# Altium PCB pcie2displayport.PcbDoc
Units mil, origin at the board's own origin, x right, y up, seen from the top; angles counter-clockwise.
Board outline 2602.36 x 1015.75 mil, 2 copper layers (Top Layer, Bottom Layer); 19 components, 15 nets, 160 pads, 80 vias.
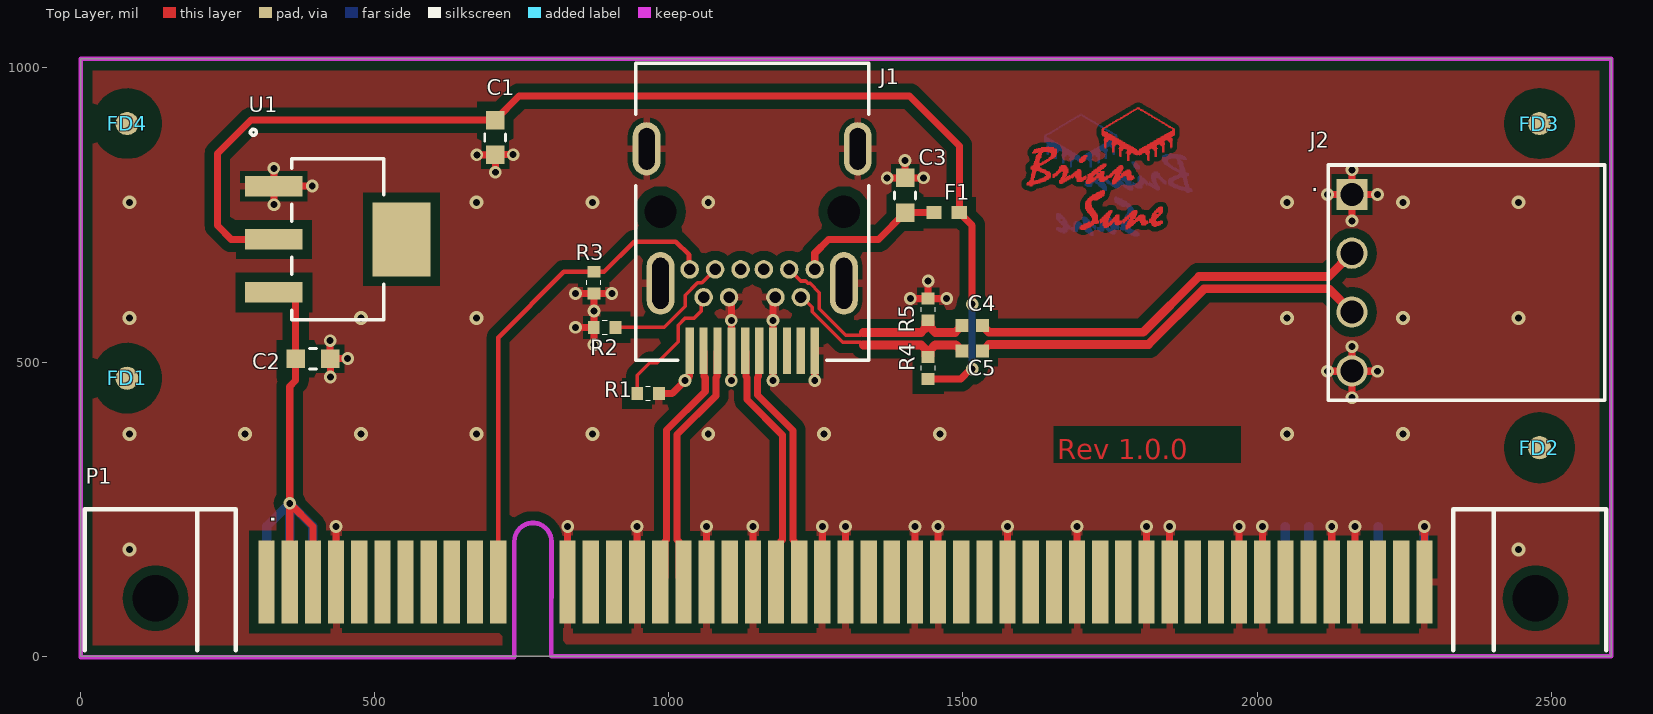
[diagram p0: Top Layer view]
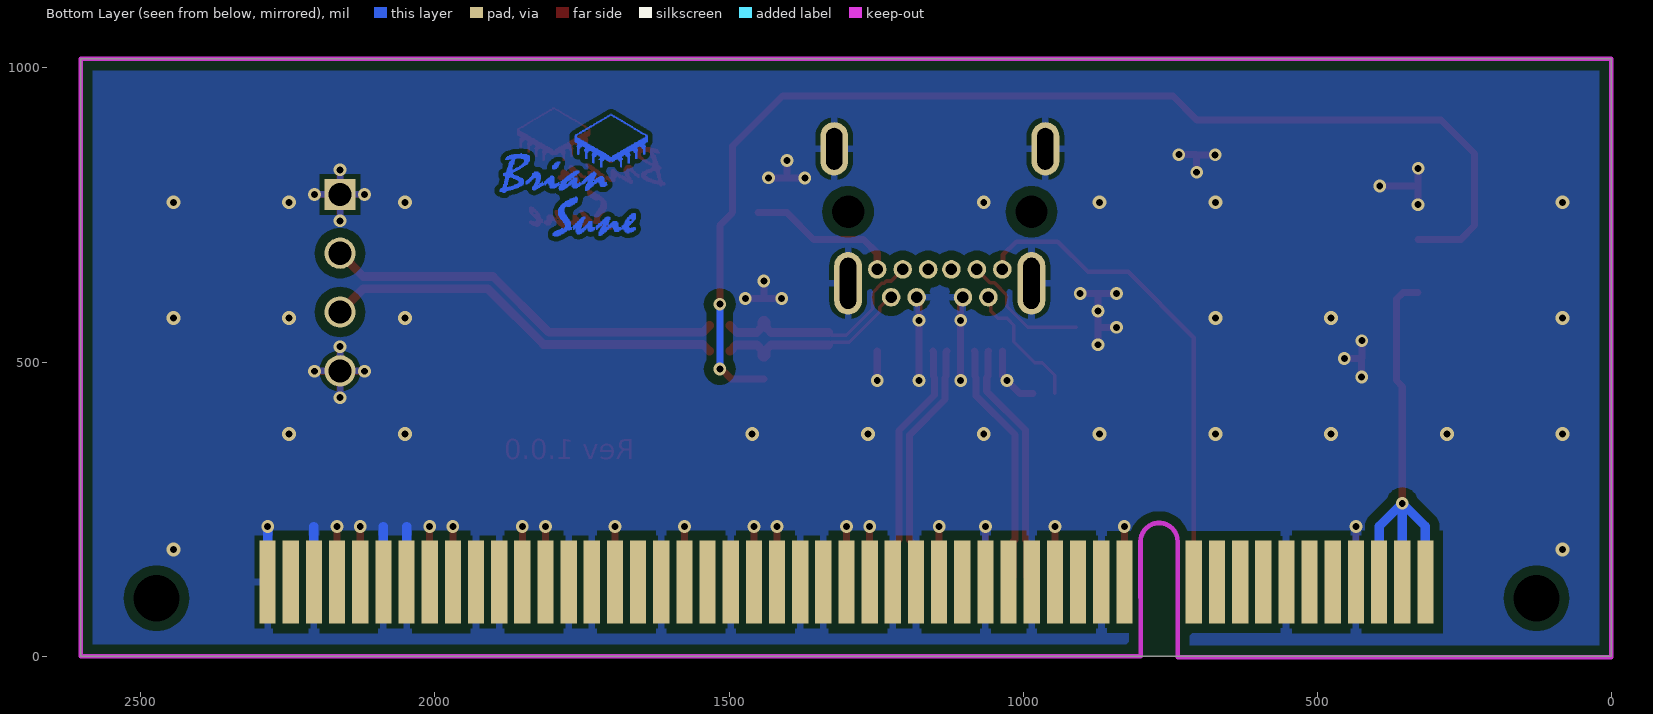
[diagram p1: Bottom Layer view, seen from below]
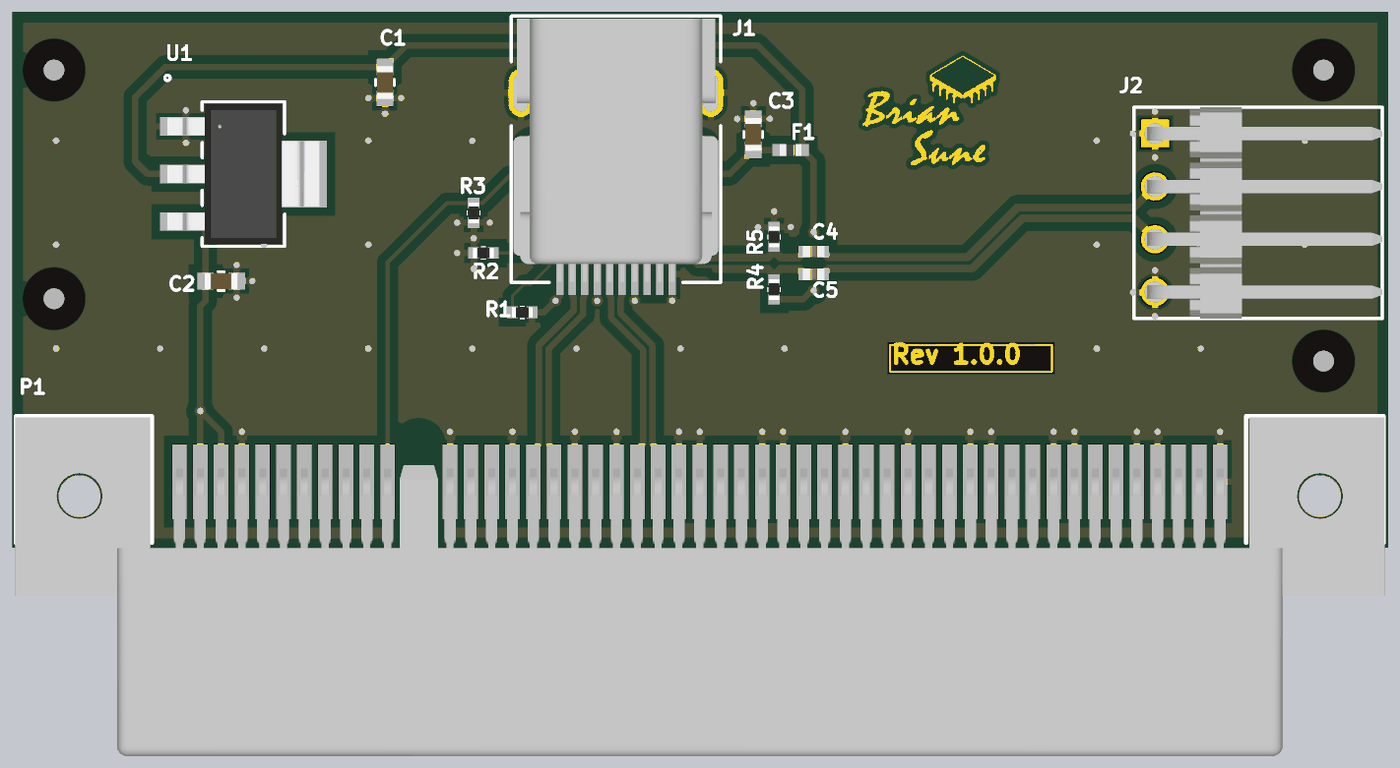
[diagram p2: 3D render of the assembled board from above, using the file's embedded part models]

## Layer stack, top to bottom
Top Solder: solder mask 0.4, Solder Resist, Dk 3.5
Top Layer: signal copper 1.4
Dielectric 1: dielectric 12.6, FR-4, Dk 4.8
Bottom Layer: signal copper 1.4
Bottom Solder: solder mask 0.4, Solder Resist, Dk 3.5

## Board outline
0,0 2602.36,0 2602.36,1015.75 0,1015.75

## Design rules (kind name [scope] priority, off if disabled: settings)
Clearance [All] p1: gap=6 ignorepadtopadclearanceinfootprint=FALSE except(0: Arc-Hole Track-Hole SMDPad-Hole THPad-Hole Via-Hole Fill-Hole Poly-Hole Region-Hole Text-Hole; 8: SMDPad-Region THPad-Region Poly-Region; 16: Arc-Poly Track-Poly SMDPad-Poly THPad-Poly Via-Poly Fill-Poly Poly-Poly)
DiffPairsRouting [All] p1: maxlimit=10 minlimit=6 mostfreqgap=8 toplayer_minwidth=6 toplayer_maxwidth=15 toplayer_prefwidth=8 bottomlayer_minwidth=6 bottomlayer_maxwidth=15 bottomlayer_prefwidth=8 maxuncoupledlength=500
Height [All] p1: minheight=0 maxheight=1574.8 prefheight=500
HoleSize [All] p1: absolutevalues=TRUE maxlimit=236.22 minlimit=1 maxpercent=80.000 minpercent=20.000
HoleToHoleClearance [All] p1: gap=3 allowstackedmicrovias=TRUE
MinimumSolderMaskSliver [All] p1: minsoldermaskwidth=1
PolygonConnect [All] p1: thpad.connectstyle=Relief thpad.reliefconductorwidth=12 thpad.reliefentries=4 thpad.polygonreliefangle="90 Angle" thpad.airgapwidth=8 smdpad.connectstyle=Relief smdpad.reliefconductorwidth=12 smdpad.reliefentries=4 smdpad.polygonreliefangle="90 Angle" smdpad.airgapwidth=8 via.connectstyle=Direct via.reliefconductorwidth=12 via.reliefentries=4 via.polygonreliefangle="45 Angle" via.airgapwidth=8
RoutingVias [All] p1: holewidth=15.75 width=23.62 viastyle="Through Hole" minholewidth=11.81 minwidth=19.68 maxholewidth=110.24 maxwidth=118.11
SilkToSilkClearance [All] p1: silktosilkclearance=3
SilkToSolderMaskClearance [IsPad] p1: minsilkscreentomaskgap=1 clearancetoexposedcopper=TRUE
SolderMaskExpansion [All] p1: expansion=1
Width [All] p1: maxlimit=40 minlimit=6 preferedwidth=10
23 further rules are at their usual default settings.

## Classes and differential pairs
differential pair class DP_DIFF_F: DP_AUX
differential pair class DP_DIFF: DP_TX_AUX DP_TX_LANE0 DP_TX_LANE1
differential pair DP_TX_AUX: +DP_TX_AUX_P -DP_TX_AUX_N
differential pair DP_AUX: +DP_AUX_P -DP_AUX_N
differential pair DP_TX_LANE1: +DP_TX_LANE1_P -DP_TX_LANE1_N
differential pair DP_TX_LANE0: +DP_TX_LANE0_P -DP_TX_LANE0_N

## Components (designator, comment, footprint, x,y, rotation, side; value= is the part's Value field where it differs from the comment)
C1 "1uF" *CAPC1608X90 704.72,881.89 r270 top
C2 "1uF" *CAPC1608X90 394.8,505.7 r0 top
C3 "1uF" *CAPC1608X90 1401.57,783.46 r90 top
C4 "0.1uF" CAP_CC0402_YAG 1515.75,561.96 r0 top
C5 "0.1uF" CAP_CC0402_YAG 1515.75,518.65 r0 top
F1 "" 0435Series_LTF 1472.44,753.94 r180 top
FD1 "fiducial" FD12D 78.74,472.44 r0 top
FD2 "fiducial" FD12D 2480.32,354.33 r0 top
FD3 "fiducial" FD12D 2480.32,905.51 r0 top
FD4 "fiducial" FD12D 78.74,905.51 r0 top
J1 "E9320-001-01" CONN_E9320-001-01_PUL 1141.73,633.86 r180 top
J2 "901210124" CON_901210124 2161.42,785.04 r90 top
P1 "2387405-3" PCIEG4,SMT,STRADDLE,98POS,G/F,O/E 768.82,0 r0 top
R1 "1M" 0402_PAN 964.57,446.63 r180 top
R2 "1M" 0402_PAN 890.95,559 r0 top
R3 "100k" 0402_PAN 872.45,634.98 r90 top
R4 "100k" 0402_PAN 1440.94,489.91 r270 top
R5 "100k" 0402_PAN 1440.94,589.52 r270 top
U1 "AMS1117-3.3" SOT_AMS_ADS 437.01,708.66 r270 top

## Footprints (in the part's own frame and the unit in brackets; to place one, negate y for a bottom-side part, rotate by r counter-clockwise, add the part's x,y. Pads: shape width x height; smd on the part's side, far side on the other; paste and mask are expansions set on the pad)
0402_PAN [mil]
  rect 20x22 smd paste+0 mask+0: 1(-18.5,0) 2(18.5,0)
  silkscreen extent -4,-12 4,12, body extent -20,-10 20,10, height 14
0435Series_LTF [mil]
  rect 26x22 smd paste+0 mask+0: 1(-21.5,0) 2(21.5,0)
  body extent -21,-11 21,11, height 16
*CAPC1608X90 [mm]
  rect 0.8x0.8 smd: 1(-0.75,0) 2(0.75,0)
  silkscreen extent -0.15,-0.45 0.15,0.45, body extent -0.8,-0.4 0.8,0.4, height 0.6
CAP_CC0402_YAG [mil]
  rect 22x22 smd: 1(-17.5,0) 2(17.5,0)
  body extent -21,-11 21,11, height 22
CON_901210124 [mm]
  rect 1.35x1.35 hole 1 mask+0.076: 1(0,0)
  round 1.35 hole 1 mask+0.076: 2(-2.54,0) 3(-5.08,0) 4(-7.62,0)
  silkscreen extent -8.89,-10.92 1.27,1.02, body extent -8.89,-10.92 1.27,0.39, height 3.8
CONN_E9320-001-01_PUL [mm]
  rect 0.356x2.007 smd paste+0 mask+0: 1(2.7,2.915) 3(2.1,2.915) 5(1.5,2.915) 7(0.9,2.915) 9(0.3,2.915) 11(-0.3,2.915) 13(-0.9,2.915) 15(-1.5,2.915) 17(-2.1,2.915) 19(-2.7,2.915)
  round 0.8 hole 0.5: 2(2.7,-0.6) 4(2.1,0.6) 6(1.6,-0.6) 8(1,0.6) 10(0.5,-0.6) 12(-0.5,-0.6) 14(-1,0.6) 16(-1.6,-0.6) 18(-2.1,0.6) 20(-2.7,-0.6)
  round 0.025 hole 1.4 unplated: F(-3.96,-3.09) F(3.96,-3.09)
  oval 1.2x2.3 hole 0.7 slot 1.8 at 90 deg: M(-4.56,-5.81) M(4.56,-5.81)
  oval 1.2x2.7 hole 0.7 slot 2.2 at 90 deg: M(-3.96,0) M(3.96,0)
  Multi-Layer lines w0.711: 3.96,0.648 3.96,0 3.96,-0.648 ; -3.96,0.648 -3.96,0 -3.96,-0.648
  silkscreen extent -5.03,-9.5 5.03,3.32, body extent -4.92,-9.37 4.93,3.29, height 6.16
FD12D [mm]
  round 1 smd mask+1: FD(0,0)
  Top Layer pour cut-out: 0,1.524 -0.661,1.373 -1.192,0.95 -1.486,0.339 -1.486,-0.339 -1.192,-0.95 -0.661,-1.373 0,-1.524 0,-1.524
  Top Layer pour cut-out: 0,-1.524 0.661,-1.373 1.192,-0.95 1.486,-0.339 1.486,0.339 1.192,0.95 0.661,1.373 0,1.524 0,1.524
  Top Layer pour cut-out: 0,0
PCIEG4,SMT,STRADDLE,98POS,G/F,O/E [mm]
  rect 0.7x3.6 smd: A01(-11.5,3.2) A02(-10.5,3.2) A03(-9.5,3.2) A04(-8.5,3.2) A05(-7.5,3.2) A06(-6.5,3.2) A07(-5.5,3.2) A08(-4.5,3.2) A09(-3.5,3.2) A10(-2.5,3.2) A11(-1.5,3.2) A12(1.5,3.2) A13(2.5,3.2) A14(3.5,3.2) A15(4.5,3.2) A16(5.5,3.2) A17(6.5,3.2) A18(7.5,3.2) A19(8.5,3.2) A20(9.5,3.2) A21(10.5,3.2) A22(11.5,3.2) A23(12.5,3.2) A24(13.5,3.2) A25(14.5,3.2) A26(15.5,3.2) A27(16.5,3.2) A28(17.5,3.2) A29(18.5,3.2) A30(19.5,3.2) A31(20.5,3.2) A32(21.5,3.2) A33(22.5,3.2) A34(23.5,3.2) A35(24.5,3.2) A36(25.5,3.2) A37(26.5,3.2) A38(27.5,3.2) A39(28.5,3.2) A40(29.5,3.2) A41(30.5,3.2) A42(31.5,3.2) A43(32.5,3.2) A44(33.5,3.2) A45(34.5,3.2) A46(35.5,3.2) A47(36.5,3.2) A48(37.5,3.2) A49(38.5,3.2)
  rect 0.7x3.6 smd far side: B01(-11.5,3.2) B02(-10.5,3.2) B03(-9.5,3.2) B04(-8.5,3.2) B05(-7.5,3.2) B06(-6.5,3.2) B07(-5.5,3.2) B08(-4.5,3.2) B09(-3.5,3.2) B10(-2.5,3.2) B11(-1.5,3.2) B12(1.5,3.2) B13(2.5,3.2) B14(3.5,3.2) B15(4.5,3.2) B16(5.5,3.2) B17(6.5,3.2) B18(7.5,3.2) B19(8.5,3.2) B20(9.5,3.2) B21(10.5,3.2) B22(11.5,3.2) B23(12.5,3.2) B24(13.5,3.2) B25(14.5,3.2) B26(15.5,3.2) B27(16.5,3.2) B28(17.5,3.2) B29(18.5,3.2) B30(19.5,3.2) B31(20.5,3.2) B32(21.5,3.2) B33(22.5,3.2) B34(23.5,3.2) B35(24.5,3.2) B36(25.5,3.2) B37(26.5,3.2) B38(27.5,3.2) B39(28.5,3.2) B40(29.5,3.2) B41(30.5,3.2) B42(31.5,3.2) B43(32.5,3.2) B44(33.5,3.2) B45(34.5,3.2) B46(35.5,3.2) B47(36.5,3.2) B48(37.5,3.2) B49(38.5,3.2)
  round 0 hole 2: M(-16.3,2.5) M(43.3,2.5)
  Keep-Out Layer lines w0.203: -0.809,-0.047 -0.8,4.953 cw(c0,4.953) 0.8,4.953 ; 0.791,0 0.8,4.952
  silkscreen extent -19.35,0.25 46.35,6.35, body extent -19.4,-10 46.4,6.3, height 3.7
SOT_AMS_ADS [mil]
  rect 35x98 smd paste+0 mask+0: 1(-90.16,-108.5) 2(0,-108.5) 3(90.16,-108.5)
  rect 126x98 smd paste+0 mask+0: 4(0,108.5)
  silkscreen extent -187,-148 137,78, body extent -132,-143 132,144, height 71

## Part data
C1 C2 C3: library part 0603F105M500NT, "1uF(105) ±20% 50V X7R 0603F105M500NT", Package="0603 Kemet", ComponentLink1Description=Taobao, ComponentLink1URL=https://item.taobao.com/item.htm?spm=a1z09.2.0.0.1e6b2e8dpr7A02&id=560896377413&_u=o10quk0k0a55, MF=KEMET, MP=C0603C104Z3VACTU, Price=None
C4 C5: library part CC0402MRX5R6BB106, "No Description Available", Mfr_Name=Yageo, Copyright="Copyright (C) 2022 Ultra Librarian. All rights reserved.", Manufacturer_Part_Number=CC0402MRX5R6BB106, RefDes=RefDes, Type=DEV
F1: library part 0402L100SLKR, "No Description Available", Mfr_Name="Littelfuse Inc", Copyright="Copyright (C) 2021 Ultra Librarian. All rights reserved.", Manufacturer_Part_Number=0402L100SLKR, RefDes=RefDes, Type=DEV
J1: "No Description Available", Mfr_Name="Pulse Electronics Corporation", Copyright="Copyright (C) 2022 Ultra Librarian. All rights reserved.", Manufacturer_Part_Number=E9320-001-01, RefDes=RefDes, Type=DEV
J2: "No Description Available", Mfr_Name="Molex Connector Corporation", Copyright="Copyright (C) 2021 Ultra Librarian. All rights reserved.", Manufacturer_Part_Number=901210124, RefDes=RefDes, Type=DEV
P1: library part PCIE-098-02-X-D-EMS2-BG, "PCIEG4,SMT,STRADDLE,98POS,G/F,O/E", Package=None, Availability=Unavailable, MF="Samtec Inc.", MP=PCIE-098-02-X-D-EMS2-BG, Price=None
R1 R2 R3 R4 R5: library part ERJ2RHD2400X, "0402 1% Resistor", Built_By=EMA_UL_Team, Copyright="Copyright (C) 2018 Accelerated Designs. All rights reserved", Manufacturer_Part_Number=ERJ2RHD2400X, RefDes=RefDes, SourceLibrary=Panasonic_2016-11-1, Type=DEV, Vendor=Panasonic
U1: "No Description Available", Built_By=EMA_Matt, Copyright="Copyright (C) 2018 Accelerated Designs. All rights reserved", Manufacturer_Part_Number=AMS1117-3.3, RefDes=RefDes, SourceLibrary=Advanced_Monolithic_Systems_10-16-2019, Type=DEV, Vendor="Advanced Monolithic Systems"

## Via types
v1: diameter 21.65, hole 11.81, Top Layer to Bottom Layer, tented both sides, 55 vias
v2: diameter 23.62, hole 11.81, Top Layer to Bottom Layer, tented both sides, 25 vias

## Nets (pads, with @x,y where several pads share a name; then routed paths per layer and width w, separated by ;. In a path a pad name is that pad's centre, name@x,y a point inside that pad or via, vN(x,y) a via of type N, cw(c..) or ccw(c..) an arc to the next point about the centre after c; other vN are vias at no path point)
+3V3: C1.1 F1.1 R4.2 U1.2 | length 2035.5
  Top Layer w12: U1.2 255.91,708.66 232.28,732.28 232.28,854.33 289.37,911.42 C1.1 745.44,952.13 1409.45,952.13 1493.94,867.64 F1.1 1515.74,732.13 v1(1515.74,598.42) ; R4.2 1496.35,471.41 1513.13,488.19 v1(1515.74,488.19)
  Bottom Layer w12: v1(1515.74,488.19) v1(1515.74,598.42)
+12: C2.1 P1.A02 P1.A03 P1.B01 P1.B02 P1.B03 U1.3 | length 1111
  Top Layer w12: U1.3 353.78,618.5 365.28,607 C2.1 365.28,468.5 355.43,458.66 v1(355.43,259.84) ; P1.A02 v1(355.43,259.84) ; P1.A03 394.8,220.47 v1(355.43,259.84)
  Bottom Layer w16: P1.B01 316.44,126.36 316.44,220.85 v1(355.43,259.84) ; P1.B02 v1(355.43,259.84) ; P1.B03 394.43,126.36 394.43,220.85 v1(355.43,259.84)
DP_AUX_N: C5.2 J2.3 | length 688.4
  Top Layer w15: C5.2 1544.4,529.81 1815.41,529.81 1910.14,624.54 2121.92,624.54 J2.3
DP_AUX_P: C4.2 J2.2 | length 688.4
  Top Layer w15: C4.2 1544.4,550.81 1806.71,550.81 1901.44,645.54 2121.92,645.54 J2.2
DP_TX_AUX_N: C5.1 J1.18 R4.1 | length 344.8
  Top Layer w6: J1.18 1227.12,610.24 1243.91,593.45 1243.91,585.58 1295.77,533.71 1326.21,533.71 1330.71,529.21
  Top Layer w15: 1330.71,529.21 1428.66,529.21 1437.44,520.43 1437.44,510.91 1439.94,508.41 R4.1 1441.94,508.41 1444.44,510.91 1444.44,520.43 1453.23,529.21 1487.69,529.21 C5.1
DP_TX_AUX_P: C4.1 J1.16 R5.2 | length 391.1
  Top Layer w6: J1.16 1224.41,637.8 1232.28,637.8 1236.22,633.86 1240.16,633.86 1255.91,618.11 1255.91,590.55 1300.74,545.71 1326.21,545.71 1330.71,550.21
  Top Layer w15: 1330.71,550.21 1428.66,550.21 1437.44,559 1437.44,568.52 1439.94,571.02 R5.2 1441.94,571.02 1444.44,568.52 1444.44,559 1453.23,550.21 1486.5,550.21 C4.1
DP_TX_HPD: J1.2 P1.A11 R3.2 | length 842.3
  Top Layer w8: P1.A11 709.76,541.6 821.65,653.48 R3.2 889.7,653.48 940.94,704.72 1011.81,704.72 1034.31,682.23 1034.31,658.6 J1.2
DP_TX_LANE0_N: J1.5 P1.A17 | length 426
  Top Layer w12: P1.A17 1016.94,133.76 1016.94,194.97 1014.04,197.88 1014.04,376.84 1079.87,442.66 1079.87,473.61 1081.68,475.42 1081.68,518.09 J1.5
DP_TX_LANE0_P: J1.3 P1.A16 | length 426
  Top Layer w12: P1.A16 993.13,133.76 993.13,194.97 996.04,197.88 996.04,384.29 1061.87,450.12 1061.87,473.61 1060.06,475.42 1060.06,518.09 J1.3
DP_TX_LANE1_N: J1.11 P1.A22 | length 423.6
  Top Layer w12: J1.11 1152.54,518.09 1152.54,475.42 1150.73,473.61 1150.73,443.76 1210.89,383.6 1210.89,197.88 1213.8,194.97 1213.8,133.76 P1.A22
DP_TX_LANE1_P: J1.9 P1.A21 | length 423.6
  Top Layer w12: J1.9 1130.92,518.09 1130.92,475.42 1132.73,473.61 1132.73,436.3 1192.89,376.14 1192.89,197.88 1189.98,194.97 1189.98,133.76 P1.A21
GND: C1.2 C2.2 C3.2 J1.1 J1.7 J1.8 J1.13 J1.14 J1.19 J1.M J2.1 J2.4 P1.A04 P1.A12 P1.A15 P1.A18 P1.A20 P1.A23 P1.A24 P1.A27 P1.A28 P1.A31 P1.A34 P1.A37 P1.A38 P1.A41 P1.A42 P1.A45 P1.A46 P1.A49 P1.B04 P1.B07 P1.B13 P1.B16 P1.B18 P1.B21 P1.B22 P1.B25 P1.B26 P1.B29 P1.B32 P1.B35 P1.B36 P1.B39 P1.B40 P1.B43 P1.B44 P1.B47 P1.B49 R1.1 R2.1 R3.1 R5.1 U1.1 | length 3541.7
  Top Layer w12: v1(328.34,829.46) U1.1@328.34,798.99 ; v1(328.51,767.66) U1.1 U1.1@328.34,798.99 ; v1(393.7,799.21) 328.56,799.21 U1.1@328.34,798.99 ; v1(424.16,536.34) C2.2@424.16,505.87 ; v1(424.33,474.55) C2.2 C2.2@424.16,505.87 ; P1.A04 v1(434.17,220.47) ; v1(453.94,505.87) C2.2@424.16,505.87 ; v1(673.57,852.36) C1.2 C1.2@704.89,852.53 ; v1(704.89,822.75) C1.2@704.89,852.53 ; v1(735.36,852.53) C1.2@704.89,852.53 ; P1.A12 v1(827.87,220.47) ; v1(841.29,559) R2.1 R2.1@872.53,559.08 ; v1(841.29,616.48) R3.1 R3.1@872.62,616.65 ; v1(872.62,529.39) 872.62,559.17 R2.1@872.53,559.08 ; v1(903.09,616.65) R3.1@872.62,616.65 ; P1.A15 v1(945.98,220.47) ; R1.1 1005.68,446.63 1035.43,476.38 J1.1 ; P1.A18 v1(1064.09,220.47) ; J1.8 1106.3,606.29 v1(1106.3,570.87) J1.7 v1(1106.3,468.5) ; P1.A20 v1(1142.83,220.47) ; v1(1177.17,468.5) J1.13 v1(1177.17,570.87) 1177.17,606.3 J1.14 ; v1(1248.03,468.5) J1.19 ; P1.A23 v1(1260.94,220.47) ; P1.A24 v1(1300.32,220.47) ; v1(1371.11,812.99) C3.2 ; v1(1401.57,842.77) C3.2 ; v1(1410.48,608.02) R5.1 ; P1.A27 v1(1418.43,220.47) ; v1(1432.9,813.16) 1401.74,813.16 C3.2 ; v1(1440.94,637.8) R5.1 ; P1.A28 v1(1457.8,220.47) ; v1(1472.27,608.19) 1441.11,608.19 R5.1 ; P1.A31 v1(1575.91,220.47) ; P1.A34 v1(1694.02,220.47) ; P1.A37 v1(1812.13,220.47) ; P1.A38 v1(1851.5,220.47) ; P1.A41 v1(1969.61,220.47) ; P1.A42 v1(2008.98,220.47) ; v1(2119.69,484.36) J2.4@2161.42,484.36 ; v1(2119.69,785.04) J2.1 ; P1.A45 v1(2127.09,220.47) ; v1(2161.42,439.48) J2.4@2161.42,484.36 ; v1(2161.42,526.09) J2.4 2161.76,484.7 J2.4@2161.59,484.53 ; v1(2161.42,740.16) J2.1 ; v1(2161.42,826.77) 2161.42,785.72 2161.76,785.38 J2.1@2161.59,785.21 ; P1.A46 v1(2166.46,220.47) ; v1(2204.72,484.36) 2161.76,484.36 J2.4@2161.59,484.53 ; v1(2204.72,785.04) 2161.76,785.04 J2.1@2161.59,785.21 ; P1.A49 v1(2284.57,220.47) ; R2.1@872.53,559.08 872.53,586.79 v1(872.62,586.88) R3.1@872.62,616.65 ; J2.4@2161.42,484.36 J2.4@2161.59,484.53 ; J2.1 J2.1@2161.59,785.21
  Bottom Layer w16: P1.B43 2048.35,220.47 ; P1.B44 2087.72,220.47 ; P1.B47 2205.83,220.47 ; P1.B49 v1(2284.57,220.47)
  other v1: 1027.56,468.5
  other v2: 82.68,181.1 2444.88,181.1 82.68,377.95 279.53,377.95 476.38,377.95 673.23,377.95 870.08,377.95 1066.93,377.95 1263.78,377.95 1460.63,377.95 2051.18,377.95 2248.03,377.95 82.68,574.8 476.38,574.8 673.23,574.8 2051.18,574.8 2248.03,574.8 2444.88,574.8 82.68,771.65 673.23,771.65 870.08,771.65 1066.93,771.65 2051.18,771.65 2248.03,771.65 2444.88,771.65
NetC3_1: C3.1 F1.2 J1.20 | length 259
  Top Layer w12: J1.20 1248.03,685.04 1271.65,708.66 1356.3,708.66 C3.1 F1.2
NetJ1_4: J1.4 R1.2 | length 227
  Top Layer w6: R1.2 946.07,477.56 967.62,499.12 980.32,499.12 1015.75,534.55 1015.75,562.88 1027.67,574.8 1043.31,574.8 1055.32,586.82 1055.32,606.51 J1.4
NetJ1_6: J1.6 R2.2 | length 221.4
  Top Layer w6: R2.2 992.07,559 1027.67,594.6 1027.67,613.86 1048.8,634.98 1056.24,634.98 J1.6
pads on no net: FD1.FD FD2.FD FD3.FD FD4.FD J1.10 J1.12 J1.15 J1.17 J1.F P1.A01 P1.A05 P1.A06 P1.A07 P1.A08 P1.A09 P1.A10 P1.A13 P1.A14 P1.A19 P1.A25 P1.A26 P1.A29 P1.A30 P1.A32 P1.A33 P1.A35 P1.A36 P1.A39 P1.A40 P1.A43 P1.A44 P1.A47 P1.A48 P1.B05 P1.B06 P1.B08 P1.B09 P1.B10 P1.B11 P1.B12 P1.B14 P1.B15 P1.B17 P1.B19 P1.B20 P1.B23 P1.B24 P1.B27 P1.B28 P1.B30 P1.B31 P1.B33 P1.B34 P1.B37 P1.B38 P1.B41 P1.B42 P1.B45 P1.B46 P1.B48 P1.M U1.4

## Polygon pours and split planes (outlines as drawn)
GND on Bottom Layer "GND_L02_P002" (solid, remove dead copper, pour order 2): 0,0 0,1015.75 2602.36,1015.75 2602.36,0
GND on Top Layer "GND_L01_P000" (solid, remove dead copper, pour order 0): 0,0 0,1015.75 2602.36,1015.75 2602.36,0

## Keep-outs
Keep-Out Layer:
  lines w8: 0,-1.85 736.97,-1.85 ; 0,0 0,1015.75 2602.36,1015.75 2602.36,0 799.97,0

## Other copper
Top Layer:
  region: 1698.86,826.75 1699.98,826.75 1699.98,825.63 1701.1,825.63 1701.1,824.51 1701.1,823.39 1701.1,822.27 1701.1,821.16 1701.1,820.04 1701.1,818.92 1701.1,817.8 1701.1,816.68 1701.1,815.56 1701.1,814.44 1702.22,814.44 1702.22,813.32 1703.34,813.32 1703.34,814.44 1705.58,814.44 1705.58,815.56 1707.82,815.56 1707.82,816.68 1710.06,816.68 1710.06,815.56 1710.06,814.44 1710.06,813.32 1711.18,813.32 1711.18,812.2 1708.94,812.2 1708.94,811.08 1707.82,811.08 1707.82,809.96 1705.58,809.96 1705.58,808.84 1704.46,808.84 1704.46,807.72 1702.22,807.72 1702.22,806.6 1694.39,806.6 1694.39,807.72 1693.27,807.72 1693.27,808.84 1693.27,809.96 1693.27,811.08 1693.27,812.2 1692.15,812.2 1692.15,813.32 1692.15,814.44 1691.03,814.44 1691.03,815.56 1688.79,815.56 1688.79,814.44 1687.67,814.44 1687.67,813.32 1686.55,813.32 1686.55,812.2 1685.43,812.2 1685.43,813.32 1684.31,813.32 1684.31,814.44 1684.31,815.56 1684.31,816.68 1684.31,817.8 1685.43,817.8 1685.43,818.92 1686.55,818.92 1686.55,820.04 1687.67,820.04 1687.67,821.16 1688.79,821.16 1688.79,822.27 1689.91,822.27 1689.91,823.39 1692.15,823.39 1692.15,824.51 1693.27,824.51 1693.27,825.63 1694.39,825.63 1694.39,826.75 1695.5,826.75 1695.5,827.87 1698.86,827.87
  region: 154 vertices and 4 holes, not listed, extent 1708.94,803.24 1747.01,836.83
  region: 170 vertices and 2 holes, not listed, extent 1771.64,725.99 1815.3,758.46
  region: 202 vertices and 2 holes, not listed, extent 1608.18,798.76 1659.68,865.94
  region: 1711.18,850.26 1711.18,849.14 1710.06,849.14 1710.06,848.03 1710.06,846.91 1708.94,846.91 1708.94,845.79 1708.94,844.67 1707.82,844.67 1707.82,843.55 1707.82,842.43 1706.7,842.43 1706.7,841.31 1705.58,841.31 1705.58,840.19 1703.34,840.19 1703.34,839.07 1698.86,839.07 1698.86,840.19 1697.74,840.19 1697.74,841.31 1697.74,842.43 1697.74,843.55 1697.74,844.67 1698.86,844.67 1698.86,845.79 1699.98,845.79 1699.98,846.91 1701.1,846.91 1701.1,848.03 1702.22,848.03 1702.22,849.14 1703.34,849.14 1703.34,850.26 1705.58,850.26 1705.58,851.38 1711.18,851.38
  region: 205 vertices and 0 holes, not listed, extent 1698.86,724.87 1741.41,792.05
  region: 1674.23,833.47 1675.35,833.47 1675.35,832.35 1676.47,832.35 1676.47,831.23 1677.59,831.23 1677.59,830.11 1677.59,828.99 1678.71,828.99 1678.71,827.87 1678.71,826.75 1678.71,825.63 1678.71,824.51 1678.71,823.39 1678.71,822.27 1677.59,822.27 1677.59,821.16 1677.59,820.04 1677.59,818.92 1676.47,818.92 1676.47,817.8 1676.47,816.68 1675.35,816.68 1675.35,815.56 1675.35,814.44 1674.23,814.44 1674.23,813.32 1674.23,812.2 1675.35,812.2 1675.35,813.32 1676.47,813.32 1676.47,814.44 1677.59,814.44 1677.59,815.56 1679.83,815.56 1679.83,816.68 1680.95,816.68 1680.95,817.8 1682.07,817.8 1682.07,816.68 1682.07,815.56 1683.19,815.56 1683.19,814.44 1683.19,813.32 1683.19,812.2 1682.07,812.2 1682.07,811.08 1679.83,811.08 1679.83,809.96 1678.71,809.96 1678.71,808.84 1676.47,808.84 1676.47,807.72 1674.23,807.72 1674.23,806.6 1673.11,806.6 1673.11,805.48 1670.87,805.48 1670.87,804.36 1668.63,804.36 1668.63,803.24 1665.28,803.24 1665.28,804.36 1664.16,804.36 1664.16,805.48 1664.16,806.6 1664.16,807.72 1664.16,808.84 1665.28,808.84 1665.28,809.96 1666.4,809.96 1666.4,811.08 1666.4,812.2 1667.52,812.2 1667.52,813.32 1667.52,814.44 1668.63,814.44 1668.63,815.56 1668.63,816.68 1669.75,816.68 1669.75,817.8 1669.75,818.92 1669.75,820.04 1669.75,821.16 1670.87,821.16 1670.87,822.27 1670.87,823.39 1669.75,823.39 1669.75,824.51 1667.52,824.51 1667.52,823.39 1665.28,823.39 1665.28,822.27 1664.16,822.27 1664.16,821.16 1663.04,821.16 1663.04,820.04 1661.92,820.04 1661.92,818.92 1660.8,818.92 1660.8,817.8 1659.68,817.8 1659.68,816.68 1658.56,816.68 1658.56,815.56 1656.32,815.56 1656.32,814.44 1655.2,814.44 1655.2,813.32 1652.96,813.32 1652.96,814.44 1652.96,815.56 1652.96,816.68 1652.96,817.8 1652.96,818.92 1654.08,818.92 1654.08,820.04 1656.32,820.04 1656.32,821.16 1657.44,821.16 1657.44,822.27 1658.56,822.27 1658.56,823.39 1659.68,823.39 1659.68,824.51 1660.8,824.51 1660.8,825.63 1661.92,825.63 1661.92,826.75 1663.04,826.75 1663.04,827.87 1664.16,827.87 1664.16,828.99 1664.16,830.11 1664.16,831.23 1664.16,832.35 1666.4,832.35 1666.4,833.47 1667.52,833.47 1667.52,834.59 1674.23,834.59
  region: 1838.81,762.94 1839.93,762.94 1839.93,761.82 1839.93,760.7 1839.93,759.58 1839.93,758.46 1839.93,757.34 1839.93,756.22 1839.93,755.1 1838.81,755.1 1838.81,753.98 1838.81,752.86 1837.69,752.86 1837.69,751.74 1836.57,751.74 1836.57,750.62 1835.45,750.62 1835.45,749.5 1834.33,749.5 1834.33,748.38 1833.21,748.38 1833.21,747.26 1832.09,747.26 1832.09,746.14 1830.97,746.14 1830.97,745.02 1829.85,745.02 1829.85,743.9 1828.74,743.9 1828.74,742.78 1827.62,742.78 1827.62,741.66 1827.62,740.55 1827.62,739.43 1829.85,739.43 1829.85,738.31 1832.09,738.31 1832.09,739.43 1835.45,739.43 1835.45,740.55 1838.81,740.55 1838.81,739.43 1839.93,739.43 1839.93,738.31 1839.93,737.19 1839.93,736.07 1838.81,736.07 1838.81,734.95 1836.57,734.95 1836.57,733.83 1835.45,733.83 1835.45,732.71 1833.21,732.71 1833.21,731.59 1828.74,731.59 1828.74,730.47 1824.26,730.47 1824.26,731.59 1822.02,731.59 1822.02,732.71 1820.9,732.71 1820.9,733.83 1820.9,734.95 1819.78,734.95 1819.78,736.07 1819.78,737.19 1816.42,737.19 1816.42,738.31 1816.42,739.43 1816.42,740.55 1816.42,741.66 1816.42,742.78 1817.54,742.78 1817.54,743.9 1819.78,743.9 1819.78,745.02 1819.78,746.14 1820.9,746.14 1820.9,747.26 1820.9,748.38 1820.9,749.5 1822.02,749.5 1822.02,750.62 1822.02,751.74 1823.14,751.74 1823.14,752.86 1824.26,752.86 1824.26,753.98 1824.26,755.1 1825.38,755.1 1825.38,756.22 1826.5,756.22 1826.5,757.34 1827.62,757.34 1827.62,758.46 1828.74,758.46 1828.74,759.58 1829.85,759.58 1829.85,760.7 1830.97,760.7 1830.97,761.82 1832.09,761.82 1832.09,762.94 1834.33,762.94 1834.33,764.06 1838.81,764.06 hole: 1832.09,753.98 1830.97,753.98 1830.97,752.86 1829.85,752.86 1829.85,751.74 1832.09,751.74 1832.09,752.86
  region: 157 vertices and 0 holes, not listed, extent 1732.45,728.23 1770.52,758.46
  region: 170 vertices and 1 holes, not listed, extent 1748.13,802.12 1791.79,834.59
  region: 782 vertices and 0 holes, not listed, extent 1735.81,842.43 1860.08,933.11
  text "Rev 1.0.0" at 1660.24,334.51 h34
Bottom Layer:
  region: 1799.63,815.56 1798.51,815.56 1798.51,814.44 1797.39,814.44 1797.39,813.32 1797.39,812.2 1797.39,811.08 1797.39,809.96 1797.39,808.84 1797.39,807.72 1797.39,806.6 1797.39,805.48 1797.39,804.36 1797.39,803.24 1796.27,803.24 1796.27,802.12 1795.15,802.12 1795.15,803.24 1792.91,803.24 1792.91,804.36 1790.67,804.36 1790.67,805.48 1788.43,805.48 1788.43,804.36 1788.43,803.24 1788.43,802.12 1787.31,802.12 1787.31,801 1789.55,801 1789.55,799.88 1790.67,799.88 1790.67,798.76 1792.91,798.76 1792.91,797.64 1794.03,797.64 1794.03,796.52 1796.27,796.52 1796.27,795.4 1804.1,795.4 1804.1,796.52 1805.22,796.52 1805.22,797.64 1805.22,798.76 1805.22,799.88 1805.22,801 1806.34,801 1806.34,802.12 1806.34,803.24 1807.46,803.24 1807.46,804.36 1809.7,804.36 1809.7,803.24 1810.82,803.24 1810.82,802.12 1811.94,802.12 1811.94,801 1813.06,801 1813.06,802.12 1814.18,802.12 1814.18,803.24 1814.18,804.36 1814.18,805.48 1814.18,806.6 1813.06,806.6 1813.06,807.72 1811.94,807.72 1811.94,808.84 1810.82,808.84 1810.82,809.96 1809.7,809.96 1809.7,811.08 1808.58,811.08 1808.58,812.2 1806.34,812.2 1806.34,813.32 1805.22,813.32 1805.22,814.44 1804.1,814.44 1804.1,815.56 1802.98,815.56 1802.98,816.68 1799.63,816.68
  region: 154 vertices and 4 holes, not listed, extent 1751.48,792.05 1789.55,825.63
  region: 170 vertices and 2 holes, not listed, extent 1683.19,714.79 1726.85,747.26
  region: 202 vertices and 2 holes, not listed, extent 1838.81,787.57 1890.31,854.74
  region: 1787.31,839.07 1787.31,837.95 1788.43,837.95 1788.43,836.83 1788.43,835.71 1789.55,835.71 1789.55,834.59 1789.55,833.47 1790.67,833.47 1790.67,832.35 1790.67,831.23 1791.79,831.23 1791.79,830.11 1792.91,830.11 1792.91,828.99 1795.15,828.99 1795.15,827.87 1799.63,827.87 1799.63,828.99 1800.75,828.99 1800.75,830.11 1800.75,831.23 1800.75,832.35 1800.75,833.47 1799.63,833.47 1799.63,834.59 1798.51,834.59 1798.51,835.71 1797.39,835.71 1797.39,836.83 1796.27,836.83 1796.27,837.95 1795.15,837.95 1795.15,839.07 1792.91,839.07 1792.91,840.19 1787.31,840.19
  region: 205 vertices and 0 holes, not listed, extent 1757.08,713.68 1799.63,780.85
  region: 1824.26,822.27 1823.14,822.27 1823.14,821.16 1822.02,821.16 1822.02,820.04 1820.9,820.04 1820.9,818.92 1820.9,817.8 1819.78,817.8 1819.78,816.68 1819.78,815.56 1819.78,814.44 1819.78,813.32 1819.78,812.2 1819.78,811.08 1820.9,811.08 1820.9,809.96 1820.9,808.84 1820.9,807.72 1822.02,807.72 1822.02,806.6 1822.02,805.48 1823.14,805.48 1823.14,804.36 1823.14,803.24 1824.26,803.24 1824.26,802.12 1824.26,801 1823.14,801 1823.14,802.12 1822.02,802.12 1822.02,803.24 1820.9,803.24 1820.9,804.36 1818.66,804.36 1818.66,805.48 1817.54,805.48 1817.54,806.6 1816.42,806.6 1816.42,805.48 1816.42,804.36 1815.3,804.36 1815.3,803.24 1815.3,802.12 1815.3,801 1816.42,801 1816.42,799.88 1818.66,799.88 1818.66,798.76 1819.78,798.76 1819.78,797.64 1822.02,797.64 1822.02,796.52 1824.26,796.52 1824.26,795.4 1825.38,795.4 1825.38,794.29 1827.62,794.29 1827.62,793.17 1829.85,793.17 1829.85,792.05 1833.21,792.05 1833.21,793.17 1834.33,793.17 1834.33,794.29 1834.33,795.4 1834.33,796.52 1834.33,797.64 1833.21,797.64 1833.21,798.76 1832.09,798.76 1832.09,799.88 1832.09,801 1830.97,801 1830.97,802.12 1830.97,803.24 1829.85,803.24 1829.85,804.36 1829.85,805.48 1828.73,805.48 1828.73,806.6 1828.73,807.72 1828.73,808.84 1828.73,809.96 1827.62,809.96 1827.62,811.08 1827.62,812.2 1828.73,812.2 1828.73,813.32 1830.97,813.32 1830.97,812.2 1833.21,812.2 1833.21,811.08 1834.33,811.08 1834.33,809.96 1835.45,809.96 1835.45,808.84 1836.57,808.84 1836.57,807.72 1837.69,807.72 1837.69,806.6 1838.81,806.6 1838.81,805.48 1839.93,805.48 1839.93,804.36 1842.17,804.36 1842.17,803.24 1843.29,803.24 1843.29,802.12 1845.53,802.12 1845.53,803.24 1845.53,804.36 1845.53,805.48 1845.53,806.6 1845.53,807.72 1844.41,807.72 1844.41,808.84 1842.17,808.84 1842.17,809.96 1841.05,809.96 1841.05,811.08 1839.93,811.08 1839.93,812.2 1838.81,812.2 1838.81,813.32 1837.69,813.32 1837.69,814.44 1836.57,814.44 1836.57,815.56 1835.45,815.56 1835.45,816.68 1834.33,816.68 1834.33,817.8 1834.33,818.92 1834.33,820.04 1834.33,821.16 1832.09,821.16 1832.09,822.27 1830.97,822.27 1830.97,823.39 1824.26,823.39
  region: 1659.68,751.74 1658.56,751.74 1658.56,750.62 1658.56,749.5 1658.56,748.38 1658.56,747.26 1658.56,746.14 1658.56,745.02 1658.56,743.9 1659.68,743.9 1659.68,742.78 1659.68,741.66 1660.8,741.66 1660.8,740.55 1661.92,740.55 1661.92,739.43 1663.04,739.43 1663.04,738.31 1664.16,738.31 1664.16,737.19 1665.28,737.19 1665.28,736.07 1666.4,736.07 1666.4,734.95 1667.52,734.95 1667.52,733.83 1668.63,733.83 1668.63,732.71 1669.75,732.71 1669.75,731.59 1670.87,731.59 1670.87,730.47 1670.87,729.35 1670.87,728.23 1668.63,728.23 1668.63,727.11 1666.4,727.11 1666.4,728.23 1663.04,728.23 1663.04,729.35 1659.68,729.35 1659.68,728.23 1658.56,728.23 1658.56,727.11 1658.56,725.99 1658.56,724.87 1659.68,724.87 1659.68,723.75 1661.92,723.75 1661.92,722.63 1663.04,722.63 1663.04,721.51 1665.28,721.51 1665.28,720.39 1669.75,720.39 1669.75,719.27 1674.23,719.27 1674.23,720.39 1676.47,720.39 1676.47,721.51 1677.59,721.51 1677.59,722.63 1677.59,723.75 1678.71,723.75 1678.71,724.87 1678.71,725.99 1682.07,725.99 1682.07,727.11 1682.07,728.23 1682.07,729.35 1682.07,730.47 1682.07,731.59 1680.95,731.59 1680.95,732.71 1678.71,732.71 1678.71,733.83 1678.71,734.95 1677.59,734.95 1677.59,736.07 1677.59,737.19 1677.59,738.31 1676.47,738.31 1676.47,739.43 1676.47,740.55 1675.35,740.55 1675.35,741.66 1674.23,741.66 1674.23,742.78 1674.23,743.9 1673.11,743.9 1673.11,745.02 1671.99,745.02 1671.99,746.14 1670.87,746.14 1670.87,747.26 1669.75,747.26 1669.75,748.38 1668.63,748.38 1668.63,749.5 1667.52,749.5 1667.52,750.62 1666.4,750.62 1666.4,751.74 1664.16,751.74 1664.16,752.86 1659.68,752.86 hole: 1666.4,742.78 1667.52,742.78 1667.52,741.66 1668.63,741.66 1668.63,740.55 1666.4,740.55 1666.4,741.66
  region: 157 vertices and 0 holes, not listed, extent 1727.97,717.03 1766.04,747.26
  region: 170 vertices and 1 holes, not listed, extent 1706.7,790.93 1750.36,823.39
  region: 782 vertices and 0 holes, not listed, extent 1638.41,831.23 1762.68,921.92

## Silkscreen, mask and mechanical layers (free items; w line width, h text height)
Top Solder:
  drawing of 12 lines, arcs and shapes, not listed
Bottom Solder:
  drawing of 11 lines, arcs and shapes, not listed